# EAGLE board CT_schematic (EAGLE 7.6.0)

Size 100 x 80 mm. Coordinates in mm from the lower left corner, seen from the top.
Outline: 0,0 100,0 100,80 0,80 0,0
Copper layers (1*16): Top 0.035mm / dielectric 1.5mm / Bottom 0.035mm
Design rules "default": minimum track width 10mil, minimum drill 24mil, track to track 8mil, track to pad 8mil, pad to pad 8mil, via to via 8mil, smd to smd 8mil, copper to edge 40mil, drill to drill 8mil, minimum pad ring 10mil, minimum via ring 8mil, stop-mask expansion 4mil, vias tented up to drill 0mil, thermal gap 10mil

## Footprints (pad centres in the part's own frame; a part is rotated, then mirrored left to right if it is on the bottom)
C0603 = smd 0.8 x 0.8: 1 -0.762,0; 2 0.762,0
C0402 = smd 0.5 x 0.5: 1 -0.508,0; 2 0.508,0
C1210 = smd 1.2 x 2.5: 1 -1.524,0; 2 1.524,0
C0805 = smd 1.2 x 1.3: 1 -1.016,0; 2 1.016,0
C1206 = smd 1.3 x 1.6: 1 -1.524,0; 2 1.524,0
L0603 = smd 0.8 x 0.8: 1 -0.762,0; 2 0.762,0
DR1040 = smd 1.6 x 3.2: 1 -4.458,0; 2 4.458,0
R0603 = smd 0.8 x 0.8: 1 -0.762,0; 2 0.762,0
LQFP100 = smd 0.3 x 1.2: 1 -6,-7.75; 2 -5.5,-7.75; 3 -5,-7.75; 4 -4.5,-7.75; 5 -4,-7.75; 6 -3.5,-7.75; 7 -3,-7.75; 8 -2.5,-7.75; 9 -2,-7.75; 10 -1.5,-7.75; 11 -1,-7.75; 12 -0.5,-7.75; 13 0,-7.75; 14 0.5,-7.75; 15 1,-7.75; 16 1.5,-7.75; 17 2,-7.75; 18 2.5,-7.75; 19 3,-7.75; 20 3.5,-7.75; 21 4,-7.75; 22 4.5,-7.75; 23 5,-7.75; 24 5.5,-7.75; 25 6,-7.75; 51 6,7.75; 52 5.5,7.75; 53 5,7.75; 54 4.5,7.75; 55 4,7.75; 56 3.5,7.75; 57 3,7.75; 58 2.5,7.75; 59 2,7.75; 60 1.5,7.75; 61 1,7.75; 62 0.5,7.75; 63 0,7.75; 64 -0.5,7.75; 65 -1,7.75; 66 -1.5,7.75; 67 -2,7.75; 68 -2.5,7.75; 69 -3,7.75; 70 -3.5,7.75; 71 -4,7.75; 72 -4.5,7.75; 73 -5,7.75; 74 -5.5,7.75; 75 -6,7.75 | smd 1.2 x 0.3: 26 7.75,-6; 27 7.75,-5.5; 28 7.75,-5; 29 7.75,-4.5; 30 7.75,-4; 31 7.75,-3.5; 32 7.75,-3; 33 7.75,-2.5; 34 7.75,-2; 35 7.75,-1.5; 36 7.75,-1; 37 7.75,-0.5; 38 7.75,0; 39 7.75,0.5; 40 7.75,1; 41 7.75,1.5; 42 7.75,2; 43 7.75,2.5; 44 7.75,3; 45 7.75,3.5; 46 7.75,4; 47 7.75,4.5; 48 7.75,5; 49 7.75,5.5; 50 7.75,6; 76 -7.75,6; 77 -7.75,5.5; 78 -7.75,5; 79 -7.75,4.5; 80 -7.75,4; 81 -7.75,3.5; 82 -7.75,3; 83 -7.75,2.5; 84 -7.75,2; 85 -7.75,1.5; 86 -7.75,1; 87 -7.75,0.5; 88 -7.75,0; 89 -7.75,-0.5; 90 -7.75,-1; 91 -7.75,-1.5; 92 -7.75,-2; 93 -7.75,-2.5; 94 -7.75,-3; 95 -7.75,-3.5; 96 -7.75,-4; 97 -7.75,-4.5; 98 -7.75,-5; 99 -7.75,-5.5; 100 -7.75,-6
TSSOP20-I = smd 0.4 x 1.35: 1 -2.925,-2.875; 2 -2.275,-2.875; 3 -1.625,-2.875; 4 -0.975,-2.875; 5 -0.325,-2.875; 6 0.325,-2.875; 7 0.975,-2.875; 8 1.625,-2.875; 9 2.275,-2.875; 10 2.925,-2.875; 11 2.925,2.875; 12 2.275,2.875; 13 1.625,2.875; 14 0.975,2.875; 15 0.325,2.875; 16 -0.325,2.875; 17 -0.975,2.875; 18 -1.625,2.875; 19 -2.275,2.875; 20 -2.925,2.875
HTSS-105-01-G-D = drill 1 pad 1.8 square: 1 0,0 | drill 1 pad 1.8: 2 0,2.54; 3 2.54,0; 4 2.54,2.54; 5 5.08,0; 6 5.08,2.54; 7 7.62,0; 8 7.62,2.54; 9 10.16,0; 10 10.16,2.54
SSOP-28 = smd 1.5 x 0.4: 1 -3.625,4.225; 2 -3.625,3.575; 3 -3.625,2.925; 4 -3.625,2.275; 5 -3.625,1.625; 6 -3.625,0.975; 7 -3.625,0.325; 8 -3.625,-0.325; 9 -3.625,-0.975; 10 -3.625,-1.625; 11 -3.625,-2.275; 12 -3.625,-2.925; 13 -3.625,-3.575; 14 -3.625,-4.225; 15 3.625,-4.225; 16 3.625,-3.575; 17 3.625,-2.925; 18 3.625,-2.275; 19 3.625,-1.625; 20 3.625,-0.975; 21 3.625,-0.325; 22 3.625,0.325; 23 3.625,0.975; 24 3.625,1.625; 25 3.625,2.275; 26 3.625,2.925; 27 3.625,3.575; 28 3.625,4.225
QFN65P400X400X100-17N = smd 1.016 x 0.356: 1 -1.803,0.965; 2 -1.803,0.33; 3 -1.803,-0.33; 4 -1.803,-0.965; 9 1.803,-0.965; 10 1.803,-0.33; 11 1.803,0.33; 12 1.803,0.965 | smd 0.356 x 1.016: 5 -0.965,-1.803; 6 -0.33,-1.803; 7 0.33,-1.803; 8 0.965,-1.803; 13 0.965,1.803; 14 0.33,1.803; 15 -0.33,1.803; 16 -0.965,1.803 | smd 2.108 x 2.108: 17 0,0
QFN-28 = smd 0.813 x 0.305: 1 -2.451,1.5; 2 -2.451,1; 3 -2.451,0.5; 4 -2.451,0; 5 -2.451,-0.5; 6 -2.451,-1; 7 -2.451,-1.5; 15 2.451,-1.5; 16 2.451,-1; 17 2.451,-0.5; 18 2.451,0; 19 2.451,0.5; 20 2.451,1; 21 2.451,1.5 | smd 0.305 x 0.813: 8 -1.5,-2.451; 9 -1,-2.451; 10 -0.5,-2.451; 11 0,-2.451; 12 0.5,-2.451; 13 1,-2.451; 14 1.5,-2.451; 22 1.5,2.451; 23 1,2.451; 24 0.5,2.451; 25 0,2.451; 26 -0.5,2.451; 27 -1,2.451; 28 -1.5,2.451 | smd 3.607 x 3.607: 29 0,0
SJ-43515TS-SMT-TR = smd 2.2 x 3: 1 0.6,-7.4; 4 3.4,-7.4 | smd 3 x 3: 2 12.8,-7.4; 5 17,-3 | smd 2 x 3: 3 5.3,0; 6 2.5,0 | drill 1.8: P$7 4.5,-3.69; P$8 11.54,-3.69
ASEK = smd 1.4 x 1: 1 -1.1,-0.8; 2 1.1,-0.8; 3 1.1,0.8; 4 -1.1,0.8
ASFL1 = smd 1.7 x 1.5: 1 -1.27,-1.1; 2 1.27,-1.1; 3 1.27,1.1; 4 -1.27,1.1
ASDMB-XX.XXXXMHZ-XX-XX-XXX = smd 0.65 x 0.85: 1 0.45,0.2; 2 2.05,0.2; 3 2.05,1.8; 4 0.45,1.8
TSOT-23-5 = smd 1.3 x 0.62: 1 -1.31,0.95; 2 -1.31,0; 3 -1.31,-0.95; 4 1.31,-0.95; 5 1.31,0.95
SOIC-8_EP = smd 1.6 x 0.533: 1 -2.921,1.905; 2 -2.921,0.635; 3 -2.921,-0.635; 4 -2.921,-1.905; 5 2.921,-1.905; 6 2.921,-0.635; 7 2.921,0.635; 8 2.921,1.905 | smd 2.54 x 3.302: EPAD 0,0 | drill 0.406 pad 0.406: P$1 -0.508,0.635; P$2 0.381,0.635; P$3 -0.508,-0.635; P$4 0.381,-0.635
DFN8_2X3MC = smd 0.813 x 0.305: 1 -1.398,0.75; 2 -1.398,0.25; 3 -1.398,-0.25; 4 -1.398,-0.75; 5 1.398,-0.75; 6 1.398,-0.25; 7 1.398,0.25; 8 1.398,0.75 | smd 1.753 x 1.549: 9 0,0
JST-2-SMD = smd 1 x 4.6: 1 -1,-3.7; 2 1,-3.7 | smd 1.6 x 3.4: NC1 -3.4,1.5; NC2 3.4,1.5
FCI_10118193-0001LF = smd 0.4 x 1.35: 1 -1.3,2.675; 2 -0.65,2.675; 3 0,2.675; 4 0.65,2.675; 5 1.3,2.675 | smd 1.6 x 1.4: 6 -3.2,2.45; 7 3.2,2.45 | smd 1.9 x 1.9: 8 -1.2,0; 9 1.2,0 | hole 0.5: -3.3,0; 3.3,0
SON-6 = smd 0.55 x 0.3: 1 -0.355,0.5 | smd 0.52 x 0.3: 2 -0.37,0; 3 -0.37,-0.5; 4 0.37,-0.5; 5 0.37,0; 6 0.37,0.5
DCU0008A_N = smd 0.5 x 0.3: 1 -1.6,0.75; 2 -1.6,0.25; 3 -1.6,-0.25; 4 -1.6,-0.75; 5 1.6,-0.75; 6 1.6,-0.25; 7 1.6,0.25; 8 1.6,0.75
SW_4-1437565-2 = smd 1.4 x 2.1: 1 -2.23,4.55; 2 -2.23,-4.55; 3 2.23,4.55; 4 2.23,-4.55
LGM67K-G1J2-24-Z = smd 0.8 x 1.4: A -2,0; C 0,0
NC7SZ125M5X = smd 1.3 x 0.7: 1 -1.3,0.95; 2 -1.3,0; 3 -1.3,-0.95; 4 1.3,-0.95; 5 1.3,0.95

## Placement (x,y rotation side)
C1  1e-06  [C0603]  -53.34,83.82 0 top  (outside the outline)
C2  1e-07  [C0603]  -57.15,83.82 0 top  (outside the outline)
C3  1e-07  [C0603]  -60.96,83.82 0 top  (outside the outline)
C4  1e-07  [C0603]  -64.77,83.82 0 top  (outside the outline)
C5  1e-07  [C0603]  -68.58,83.82 0 top  (outside the outline)
C6  1e-07  [C0603]  -72.39,83.82 0 top  (outside the outline)
C7  1e-07  [C0603]  -76.2,83.82 0 top  (outside the outline)
C8  4.7e-06  [C0603]  -49.53,83.82 0 top  (outside the outline)
C9  1e-08  [C0603]  -80.01,83.82 0 top  (outside the outline)
C10  1e-06  [C0603]  -83.82,83.82 0 top  (outside the outline)
C11  1e-07  [C0402]  -49.53,88.9 0 top  (outside the outline)
C12  1e-07  [C0402]  -53.34,88.9 0 top  (outside the outline)
C13  1e-07  [C0402]  -57.15,88.9 0 top  (outside the outline)
C14  1e-07  [C0402]  -60.96,88.9 0 top  (outside the outline)
C15  1e-07  [C0402]  -64.77,88.9 0 top  (outside the outline)
C16  1e-07  [C0402]  -68.58,88.9 0 top  (outside the outline)
C17  1e-07  [C0402]  -72.39,88.9 0 top  (outside the outline)
C18  1e-07  [C0402]  -76.2,88.9 0 top  (outside the outline)
C19  1e-07  [C0402]  -80.01,88.9 0 top  (outside the outline)
C20  1e-07  [C0402]  -83.82,88.9 0 top  (outside the outline)
C21  1e-07  [C0402]  -87.63,88.9 0 top  (outside the outline)
C22  1e-07  [C0402]  -91.44,88.9 0 top  (outside the outline)
C23  1e-06  [C0603]  -87.63,83.82 0 top  (outside the outline)
C24  1e-07  [C0402]  -15.24,93.98 0 top  (outside the outline)
C25  1e-07  [C0402]  -19.05,93.98 0 top  (outside the outline)
C26  1e-06  [C0603]  -15.24,88.9 0 top  (outside the outline)
C27  2.2e-05  [C1210]  -80.01,63.5 0 top  (outside the outline)
C28  2.2e-05  [C1210]  -86.36,63.5 0 top  (outside the outline)
C29  1e-09  [C0402]  -22.86,93.98 0 top  (outside the outline)
C30  1e-09  [C0402]  -26.67,93.98 0 top  (outside the outline)
C31  1e-07  [C0402]  -30.48,93.98 0 top  (outside the outline)
C32  1e-07  [C0402]  -34.29,93.98 0 top  (outside the outline)
C33  1e-07  [C0402]  -38.1,93.98 0 top  (outside the outline)
C34  1e-07  [C0402]  -41.91,93.98 0 top  (outside the outline)
C35  1e-07  [C0402]  -45.72,93.98 0 top  (outside the outline)
C36  1e-05  [C0805]  -59.69,72.39 0 top  (outside the outline)
C37  1e-05  [C0805]  -64.77,72.39 0 top  (outside the outline)
C38  1e-05  [C0805]  -69.85,72.39 0 top  (outside the outline)
C39  1e-05  [C0805]  -74.93,72.39 0 top  (outside the outline)
C40  1e-05  [C0805]  -80.01,72.39 0 top  (outside the outline)
C41  1e-08  [C0402]  -49.53,93.98 0 top  (outside the outline)
C42  1e-08  [C0402]  -53.34,93.98 0 top  (outside the outline)
C43  1e-08  [C0402]  -57.15,93.98 0 top  (outside the outline)
C44  1e-05  [C0805]  -85.09,72.39 0 top  (outside the outline)
C45  1e-05  [C0805]  -90.17,72.39 0 top  (outside the outline)
C46  1e-05  [C1210]  -16.51,73.66 0 top  (outside the outline)
C47  1e-05  [C1210]  -22.86,73.66 0 top  (outside the outline)
C48  1e-05  [C1210]  -29.21,73.66 0 top  (outside the outline)
C49  1e-05  [C1210]  -35.56,73.66 0 top  (outside the outline)
C50  1e-07  [C0402]  -60.96,93.98 0 top  (outside the outline)
C51  1e-05  [C1206]  -41.91,73.66 0 top  (outside the outline)
C52  1e-05  [C1206]  -48.26,73.66 0 top  (outside the outline)
C53  1e-08  [C0402]  -64.77,93.98 0 top  (outside the outline)
C54  1e-07  [C0402]  -68.58,93.98 0 top  (outside the outline)
C55  1e-08  [C0402]  -72.39,93.98 0 top  (outside the outline)
C56  1e-07  [C0402]  -76.2,93.98 0 top  (outside the outline)
C57  1e-08  [C0402]  -80.01,93.98 0 top  (outside the outline)
F1  240.0  [L0603]  -19.05,88.9 0 top  (outside the outline)
I1  3.8e-06  [DR1040]  -53.34,44.45 0 top  (outside the outline)
R2  1000.0  [R0603]  -22.86,88.9 0 top  (outside the outline)
R4  4700.0  [R0603]  -26.67,88.9 0 top  (outside the outline)
R6  2200.0  [R0603]  -30.48,88.9 0 top  (outside the outline)
R7  10000.0  [R0603]  -60.96,78.74 0 top  (outside the outline)
R8  10000.0  [R0603]  -66.04,78.74 0 top  (outside the outline)
R9  100000.0  [R0603]  -35.56,78.74 0 top  (outside the outline)
R10  10000.0  [R0603]  -71.12,78.74 0 top  (outside the outline)
R11  10000.0  [R0603]  -76.2,78.74 0 top  (outside the outline)
R12  10000.0  [R0603]  -81.28,78.74 0 top  (outside the outline)
R13  10000.0  [R0603]  -86.36,78.74 0 top  (outside the outline)
R14  47.0  [R0603]  -34.29,88.9 0 top  (outside the outline)
R15  47000.0  [R0603]  -15.24,83.82 0 top  (outside the outline)
R16  47000.0  [R0603]  -20.32,83.82 0 top  (outside the outline)
R17  47000.0  [R0603]  -25.4,83.82 0 top  (outside the outline)
R18  680.0  [R0603]  -38.1,88.9 0 top  (outside the outline)
R19  490000.0  [R0603]  -40.64,78.74 0 top  (outside the outline)
R20  1000000.0  [R0603]  -30.48,78.74 0 top  (outside the outline)
R21  4031.5447154472  [R0603]  -25.4,78.74 0 top  (outside the outline)
R22  2200.0  [R0603]  -41.91,88.9 0 top  (outside the outline)
R23  10000.0  [R0603]  -30.48,83.82 0 top  (outside the outline)
R24  10000.0  [R0603]  -35.56,83.82 0 top  (outside the outline)
R25  82000.0  [R0603]  -40.64,83.82 0 top  (outside the outline)
R26  300000.0  [R0603]  -45.72,78.74 0 top  (outside the outline)
R27  120000.0  [R0603]  -50.8,78.74 0 top  (outside the outline)
R28  2000.0  [R0603]  -45.72,88.9 0 top  (outside the outline)
R29  10000.0  [R0603]  -45.72,83.82 0 top  (outside the outline)
R30  200000.0  [R0603]  -55.88,78.74 0 top  (outside the outline)
U1  STM32F358VCT6  [LQFP100]  -30.48,8.89 0 top  (outside the outline)
U2  SP3203ECY-L/TR  [TSSOP20-I]  -43.18,44.45 0 top  (outside the outline)
U3  HTSS-105-01-G-D  [HTSS-105-01-G-D]  -88.9,41.91 0 top  (outside the outline)
U4  ST3241EBPR  [SSOP-28]  -19.05,30.48 0 top  (outside the outline)
U5  HTSS-105-01-G-D  [HTSS-105-01-G-D]  -27.94,54.61 0 top  (outside the outline)
U6  TSC2008TRGVRQ1  [QFN65P400X400X100-17N]  -87.63,7.62 0 top  (outside the outline)
U7  HTSS-105-01-G-D  [HTSS-105-01-G-D]  -46.99,54.61 0 top  (outside the outline)
U8  TSC2013QRSARQ1  [QFN65P400X400X100-17N]  -60.96,7.62 0 top  (outside the outline)
U9  HTSS-105-01-G-D  [HTSS-105-01-G-D]  -66.04,54.61 0 top  (outside the outline)
U10  WM8731CLSEFL  [QFN-28]  -72.39,64.77 0 top  (outside the outline)
U11  SJ-43515TS-SMT-TR  [SJ-43515TS-SMT-TR]  -50.8,31.75 0 top  (outside the outline)
U12  SJ-43515TS-SMT-TR  [SJ-43515TS-SMT-TR]  -78.74,31.75 0 top  (outside the outline)
U13  ASEK-2-32.768KHz-ECST  [ASEK]  -43.18,64.77 0 top  (outside the outline)
U14  ASFL1-12.288MHZ-EC-T  [ASFL1]  -87.63,54.61 0 top  (outside the outline)
U15  ASDMB-25.000MHZ-EC-T  [ASDMB-XX.XXXXMHZ-XX-XX-XXX]  -16.51,1.27 0 top  (outside the outline)
U16  ltc3406es5  [TSOT-23-5]  -15.24,78.74 0 top  (outside the outline)
U17  MIC5234YME  [SOIC-8_EP]  -50.8,63.5 0 top  (outside the outline)
U18  MCP73831T-2ACI/MC  [DFN8_2X3MC]  -35.56,97.79 0 top  (outside the outline)
U19  S2B-PH-SM4-TB(LF)(SN)  [JST-2-SMD]  -68.58,44.45 0 top  (outside the outline)
U20  10118193-0001LF  [FCI_10118193-0001LF]  -19.05,64.77 0 top  (outside the outline)
U21  TPS3895ADRYR  [SON-6]  -29.21,97.79 0 top  (outside the outline)
U22  LSF0102DCTR  [DCU0008A_N]  -24.13,97.79 0 top  (outside the outline)
U23  4-1437565-2  [SW_4-1437565-2]  -27.94,44.45 0 top  (outside the outline)
U24  Q65110A2395  [LGM67K-G1J2-24-Z]  -59.69,64.77 0 top  (outside the outline)
U25  nc7sz125m5x  [NC7SZ125M5X]  -53.34,72.39 0 top  (outside the outline)

## Library data of the parts
C1-C57 F1 I1 R2 R4 R6-R30 U1-U25 = circuit_tree

## Nets
CLK_U1_8: U1.8 U13.3
CLK_U1_12: U1.12 U15.3
CLK_U10_1: U10.1 U14.3
GND: C1.2 C2.2 C3.2 C4.2 C5.2 C6.2 C7.2 C8.2 C9.2 C10.2 C11.2 C12.2 C15.2 C16.2 C17.2 C20.2 C21.2 C22.2 C23.2 C30.2 C31.2 C32.2 C33.2 C34.2 C35.2 C36.2 C37.2 C38.2 C39.2 C40.2 C41.2 C42.2 C43.2 C44.2 C45.1 C45.2 C46.2 C47.2 C48.2 C49.2 C50.2 C51.2 C52.2 C53.2 C54.2 C55.2 C56.2 C57.2 R2.2 R7.2 R8.2 R15.2 R16.2 R17.2 R19.2 R22.2 R25.2 R27.2 R28.2 U1.20 U1.49 U1.74 U1.99 U2.18 U3.9 U4.23 U4.25 U5.9 U6.10 U6.12 U6.17 U7.9 U8.17 U9.9 U10.4 U10.15 U10.19 U10.25 U10.26 U10.29 U11.1 U12.1 U13.2 U14.2 U15.2 U16.2 U17.7 U17.EPAD U18.6 U18.9 U19.2 U20.5 U20.6 U20.7 U20.8 U20.9 U21.2 U22.1 U24.C U25.1 U25.3
INPUT_USBPOWER_5V: C51.1 R29.2 U18.1 U18.2 U20.1
NET_U1_14: R4.1 U1.14 U25.4
NET_U1_22: C9.1 C10.1 F1.1 U1.21 U1.22
NET_U1_37: R8.1 U1.37
NET_U1_76: R6.1 U1.76 U8.1
NET_U1_94: R7.1 U1.94
NET_U1_97: U24.A
NET_U1_98: U23.3 U23.4
NET_U2_1: C13.1 U2.1
NET_U2_2: C15.1 U2.2
NET_U2_3: C13.2 U2.3
NET_U2_4: C14.1 U2.4
NET_U2_5: C14.2 U2.5
NET_U2_6: C16.1 U2.6
NET_U2_20: U2.20
NET_U3_3: U2.14 U3.3
NET_U3_4: U2.13 U3.4
NET_U3_5: U2.17 U3.5
NET_U3_6: U2.16 U3.6
NET_U4_1: C19.1 U4.1
NET_U4_2: C19.2 U4.2
NET_U4_3: C21.1 U4.3
NET_U4_22: R9.1 U4.22
NET_U4_24: C18.2 U4.24
NET_U4_27: C20.1 U4.27
NET_U4_28: C18.1 U4.28
NET_U5_3: U4.4 U5.3
NET_U5_4: U4.5 U5.4
NET_U5_5: U4.9 U5.5
NET_U5_6: U4.10 U5.6
NET_U6_15: R11.1 U6.15
NET_U7_3: U6.7 U7.3
NET_U7_4: U6.9 U7.4
NET_U7_5: U6.6 U7.5
NET_U7_6: U6.8 U7.6
NET_U8_4: R13.1 U8.4
NET_U8_5: R12.1 U8.5
NET_U8_9: C24.2 C25.2 C26.2 R14.2 U8.9
NET_U8_15: R14.1 U8.8 U8.15
NET_U9_3: U8.12 U9.3
NET_U9_4: U8.14 U9.4
NET_U9_5: U8.11 U9.5
NET_U9_6: U8.13 U9.6
NET_U10_9: U10.9
NET_U10_20: C35.1 C40.1 U10.20
NET_U11_2: C28.1 R16.1 U11.2
NET_U11_5: C27.1 R15.1 U11.5
NET_U11_13: C27.2
NET_U11_14: C28.2
NET_U12_5: C29.1 C30.1 R17.1 R18.1 U12.5
NET_U12_21: R18.2
NET_U12_22: C29.2
NET_U16_1: U16.1
NET_U16_3: I1.1 U16.3
NET_U16_5: R19.1 R20.1 U16.5
NET_U16_ATNET_3: I1.2 R20.2
NET_U17_4: R21.2 R22.1 U17.4
NET_U18_5: R29.1 U18.5
NET_U18_8: R28.1 U18.8
NET_U21_1: R24.1 R25.1 U21.1
NET_U21_3: R26.2 R27.1 U21.3
NET_U21_4: R23.1 U21.4 U25.2
NET_U22_8: R30.1 U22.8
NET_U23_1: R2.1 U23.1 U23.2
PROC_I2S2_CK: U1.52 U10.7
PROC_I2S2_EXT_SD: U1.53 U10.10
PROC_I2S2_SD: U1.54 U10.8
PROC_I2S2_WS: U1.51 U10.9 U10.11
PROC_SPI1_MISO: U1.31 U6.16
PROC_SPI1_MOSI: U1.32 U6.2
PROC_SPI1_NSS: R10.1 U1.29 U6.3
PROC_SPI1_SCK: U1.30 U6.4
PROC_UART4_RX_TOIOBUF: U22.3
PROC_UART4_RX_TOXCVR: U4.19 U22.6
PROC_UART4_TX_TOIOBUF: U22.4
PROC_UART4_TX_TOXCVR: U4.14 U22.5
PROC_UART5_RX: U1.83 U2.11
PROC_UART5_TX: U1.80 U2.7
VCC_S1_3V7: C44.1 C46.1 C47.1 C52.1 U16.4 U17.5 U17.8 U18.3 U18.4 U19.1
VCC_TIER1_1V8: C1.1 C2.1 C3.1 C4.1 C5.1 C6.1 C7.1 C8.1 C12.1 C22.1 C23.1 C24.1 C31.1 C32.1 C33.1 C34.1 C36.1 C37.1 C38.1 C39.1 C41.1 C43.1 C45.2 C50.1 C55.1 C56.1 C57.1 F1.2 I1.2 R4.2 R6.2 R10.2 R11.2 R12.2 R13.2 R20.2 R23.2 R24.2 R26.1 U1.6 U1.28 U1.50 U1.75 U1.100 U2.12 U6.5 U8.7 U10.3 U10.5 U10.12 U10.18 U13.4 U15.4 U21.6 U22.2 U25.5
VCC_TIER1_3V3: C11.1 C17.1 C25.1 C26.1 C42.1 C48.1 C49.1 C53.1 C54.1 R9.2 R21.1 R30.2 U2.19 U4.26 U8.10 U14.4 U17.1 U22.7

## Tracks (layer width: path | path; a pad name or v marks a point on that pad's centre or on a via)
CLK_U1_8  (1 unrouted)
CLK_U1_12  (1 unrouted)
CLK_U10_1  (1 unrouted)
GND  (100 unrouted)
INPUT_USBPOWER_5V  (4 unrouted)
NET_U1_14  (2 unrouted)
NET_U1_22  (4 unrouted)
NET_U1_37  (1 unrouted)
NET_U1_76  (2 unrouted)
NET_U1_94  (1 unrouted)
NET_U1_98  (1 unrouted)
NET_U2_1  (1 unrouted)
NET_U2_2  (1 unrouted)
NET_U2_3  (1 unrouted)
NET_U2_4  (1 unrouted)
NET_U2_5  (1 unrouted)
NET_U2_6  (1 unrouted)
NET_U3_3  (1 unrouted)
NET_U3_4  (1 unrouted)
NET_U3_5  (1 unrouted)
NET_U3_6  (1 unrouted)
NET_U4_1  (1 unrouted)
NET_U4_2  (1 unrouted)
NET_U4_3  (1 unrouted)
NET_U4_22  (1 unrouted)
NET_U4_24  (1 unrouted)
NET_U4_27  (1 unrouted)
NET_U4_28  (1 unrouted)
NET_U5_3  (1 unrouted)
NET_U5_4  (1 unrouted)
NET_U5_5  (1 unrouted)
NET_U5_6  (1 unrouted)
NET_U6_15  (1 unrouted)
NET_U7_3  (1 unrouted)
NET_U7_4  (1 unrouted)
NET_U7_5  (1 unrouted)
NET_U7_6  (1 unrouted)
NET_U8_4  (1 unrouted)
NET_U8_5  (1 unrouted)
NET_U8_9  (4 unrouted)
NET_U8_15  (2 unrouted)
NET_U9_3  (1 unrouted)
NET_U9_4  (1 unrouted)
NET_U9_5  (1 unrouted)
NET_U9_6  (1 unrouted)
NET_U10_20  (2 unrouted)
NET_U11_2  (2 unrouted)
NET_U11_5  (2 unrouted)
NET_U12_5  (4 unrouted)
NET_U16_3  (1 unrouted)
NET_U16_5  (2 unrouted)
NET_U16_ATNET_3  (1 unrouted)
NET_U17_4  (2 unrouted)
NET_U18_5  (1 unrouted)
NET_U18_8  (1 unrouted)
NET_U21_1  (2 unrouted)
NET_U21_3  (2 unrouted)
NET_U21_4  (2 unrouted)
NET_U22_8  (1 unrouted)
NET_U23_1  (2 unrouted)
PROC_I2S2_CK  (1 unrouted)
PROC_I2S2_EXT_SD  (1 unrouted)
PROC_I2S2_SD  (1 unrouted)
PROC_I2S2_WS  (2 unrouted)
PROC_SPI1_MISO  (1 unrouted)
PROC_SPI1_MOSI  (1 unrouted)
PROC_SPI1_NSS  (2 unrouted)
PROC_SPI1_SCK  (1 unrouted)
PROC_UART4_RX_TOXCVR  (1 unrouted)
PROC_UART4_TX_TOXCVR  (1 unrouted)
PROC_UART5_RX  (1 unrouted)
PROC_UART5_TX  (1 unrouted)
VCC_S1_3V7  (9 unrouted)
VCC_TIER1_1V8  (55 unrouted)
VCC_TIER1_3V3  (17 unrouted)